# Altium PCB BLDC-2020_REMOTE_2544.PcbDoc (part 2 of 3)
Units mil, origin at the board's own origin, x right, y up, seen from the top; angles counter-clockwise.
Board outline 3000 x 7500 mil, 4 copper layers (Top Layer, GND, Power, Bottom Layer), stack 26.468 mil thick; 190 components, 136 nets, 675 pads, 43 vias.
Unrouted connection lines stored in the file: 286.
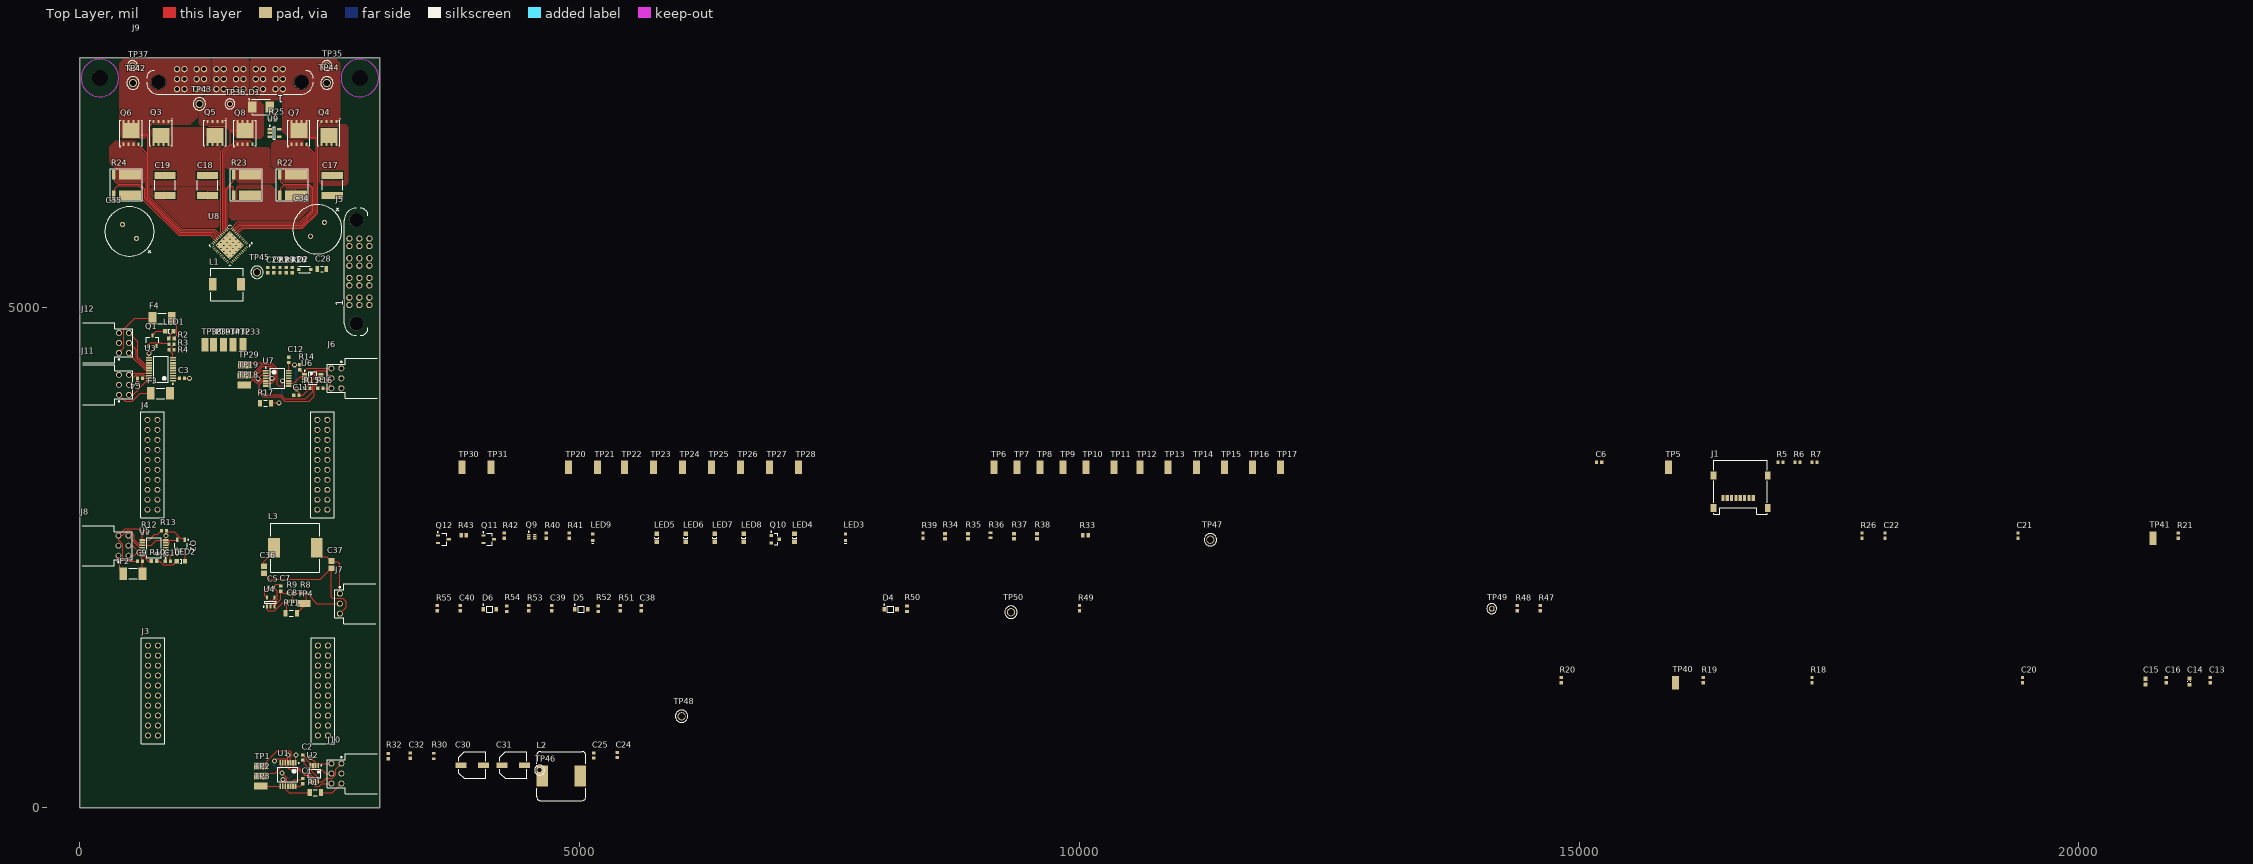
[diagram p0: Top Layer view]

## Part data (continued)
L2: library part CMP-2000-07146-1, "Shielded Power Inductor, 15 uH, +/- 20%, -40 to 125 degC, 2-Pin SMD, RoHS, Tape and Reel", Manufacturer=Bourns, Maximum DC Current=5A, Maximum DC Resistance=27mOhm, Package/Case=12.8X12.8X6.5, Package Description="2-Pin Surface Mount Device, Body 12.5 x 12.5 mm", Package Reference=SRR1260, Tolerance=20%, Category=InductorSurfaceMount, Core Material=Ferrite, Datasheet URL=http://www.bourns.com/docs/Product-Datasheets/SRR1260.pdf, Datasheet Version=03/2015, Inductance=15uH, Manufacturer URL=http://www.bourns.com/, Minimum Quality Factor=25(Typ)@2.52MHz, Mounting Technology=SurfaceMount, Product Height=6.5mm, Type=Power
L3: library part DR125-124-R, "Fixed Inductors 120 000uH 0.069A 150ohms", Case/Package=120, Current=60A, Current Rating=60mA, DC Resistance (DCR)=150R, Inductance=120mH, Manufacturer 1="Eaton Bussmann", Max DC Current=69mA, Max Operating Temperature=125°C, Min Operating Temperature=-40°C, Package Quantity=600, Saturation Current=58A, Test Frequency=100kHz, Tolerance=20%, ComponentLink1Description=https://datasheet.ciiva.com/16291/4a32919a-7470-4ae0-be45-b59e3a1351ef-16291744.pdf?src-supplier=Future+Electronics, ComponentLink1URL=https://datasheet.ciiva.com/16291/4a32919a-7470-4ae0-be45-b59e3a1351ef-16291744.pdf?src-supplier=Future+Electronics, ComponentLink2Description=https://datasheet.ciiva.com/4958/bus-elx-ds-4315-dr-series-4958109.pdf?src-supplier=Mouser, ComponentLink2URL=https://datasheet.ciiva.com/4958/bus-elx-ds-4315-dr-series-4958109.pdf?src-supplier=Mouser, Core Material=Ferrite, DC Current=60mA, Depth=12.5mm, Height=6mm, Lead Free="Lead Free", Length=12.5mm, Manufacturer Part Number 1=DR125-124-R, Military Standard=Not, Mount="Surface Mount", Number of Pins=2, Packaging="Tape and Reel", Pricing 1="1=1.95000, 10=1.80100, 100=1.26060 (USD)", RoHS=Yes, Shielding=Shielded, Stock 1=1520, Supplier 1=Digi-Key, Termination=SMD/SMT, Weight=0.016oz, Width=0.492inch
LED1 LED2 LED4 LED5 LED6 LED7 LED8: library part CMP-1426-00007-1, "SMD mono-color Chip LED, WL-SMCW, Green", Color=Green, Manufacturer="Wuerth Elektronik", ComponentLink1Description="Manufacturer URL", ComponentLink1URL=http://www.we-online.com, ComponentLink2Description=Datasheet, ComponentLink2URL=http://katalog.we-online.com/led/datasheet/150080GS75000.pdf, PackageReference=0805_A, PartNumber=150080GS75000
LED3 LED9: library part CMP-1426-00006-1, "SMD mono-color Chip LED, WL-SMCW, Bright Green", Color="Bright Green", Manufacturer="Wuerth Elektronik", ComponentLink1Description="Manufacturer URL", ComponentLink1URL=http://www.we-online.com, ComponentLink2Description=Datasheet, ComponentLink2URL=http://katalog.we-online.com/led/datasheet/150060VS75000.pdf, PackageReference=0603_A, PartNumber=150060VS75000
Q1 Q2 Q11 Q12: "MOSFET N-CH 12V 9.3A SC59", Capacitance=2.426E-09F, Case/Package=TO-236-3, Continuous Drain Current (ID)=9.3A, Drain to Source Breakdown Voltage=12V, Drain to Source Resistance=41mR, Gate to Source Voltage (Vgs)=4.5V, Input Capacitance=2.426nF, Manufacturer 1=Diodes, Max Operating Temperature=150°C, Max Power Dissipation=680mW, Min Operating Temperature=-55°C, Package Quantity=3000, ComponentLink1Description=http://www.mouser.com/ds/2/115/DMN1019USN-336718.pdf?src-supplier=Mouser, ComponentLink1URL=http://www.mouser.com/ds/2/115/DMN1019USN-336718.pdf?src-supplier=Mouser, ComponentLink2Description=https://www.diodes.com/assets/Datasheets/DMN1019USN.pdf?src-supplier=Digi-Key, ComponentLink2URL=https://www.diodes.com/assets/Datasheets/DMN1019USN.pdf?src-supplier=Digi-Key, Drain to Source Voltage (Vdss)=12V, Element Configuration=Single, Fall Time=16.8ns, Lead Free="Lead Free", Manufacturer Part Number 1=DMN1019USN-7, Mount="Surface Mount", Number of Channels=1, Packaging="Tape and Reel", Pricing 1="1=0.44000, 10=0.35400, 100=0.24130, 500=0.18096, 1000=0.13572 (USD)", Rds On Max=10mR, Rise Time=57.6ns, RoHS=Yes, Stock 1=30621, Supplier 1=Digi-Key, Turn-Off Delay Time=22.2ns, Turn-On Delay Time=7.6ns, Weight=0.000282oz
Q3 Q4 Q5 Q6 Q7 Q8: "MOSFET N-CH 60V 100A 8TDSON", Manufacturer 1=Infineon, ComponentLink1Description=https://www.infineon.com/dgdl/Infineon-BSC027N06LS5-DS-v02_00-EN.pdf?fileId=5546d46258fc0bc101596e1c881234d6&src-supplier=Digi-Key, ComponentLink1URL=https://www.infineon.com/dgdl/Infineon-BSC027N06LS5-DS-v02_00-EN.pdf?fileId=5546d46258fc0bc101596e1c881234d6&src-supplier=Digi-Key, Manufacturer Part Number 1=BSC027N06LS5ATMA1, Pricing 1="1=2.07000, 10=1.85900, 100=1.49430, 500=1.22768, 1000=1.01722 (USD)", RoHS=No, Stock 1=3937, Supplier 1=Digi-Key